# Altium PCB CC_SoC Debugger Ver1.02.PcbDoc (part 1 of 2)
Units mil, origin at the board's own origin, x right, y up, seen from the top; angles counter-clockwise.
Board outline 3750.19 x 1742.31 mil, 3 copper layers (TopLayer, MidLayer24, BottomLayer); 42 components, 43 nets, 177 pads, 79 vias.
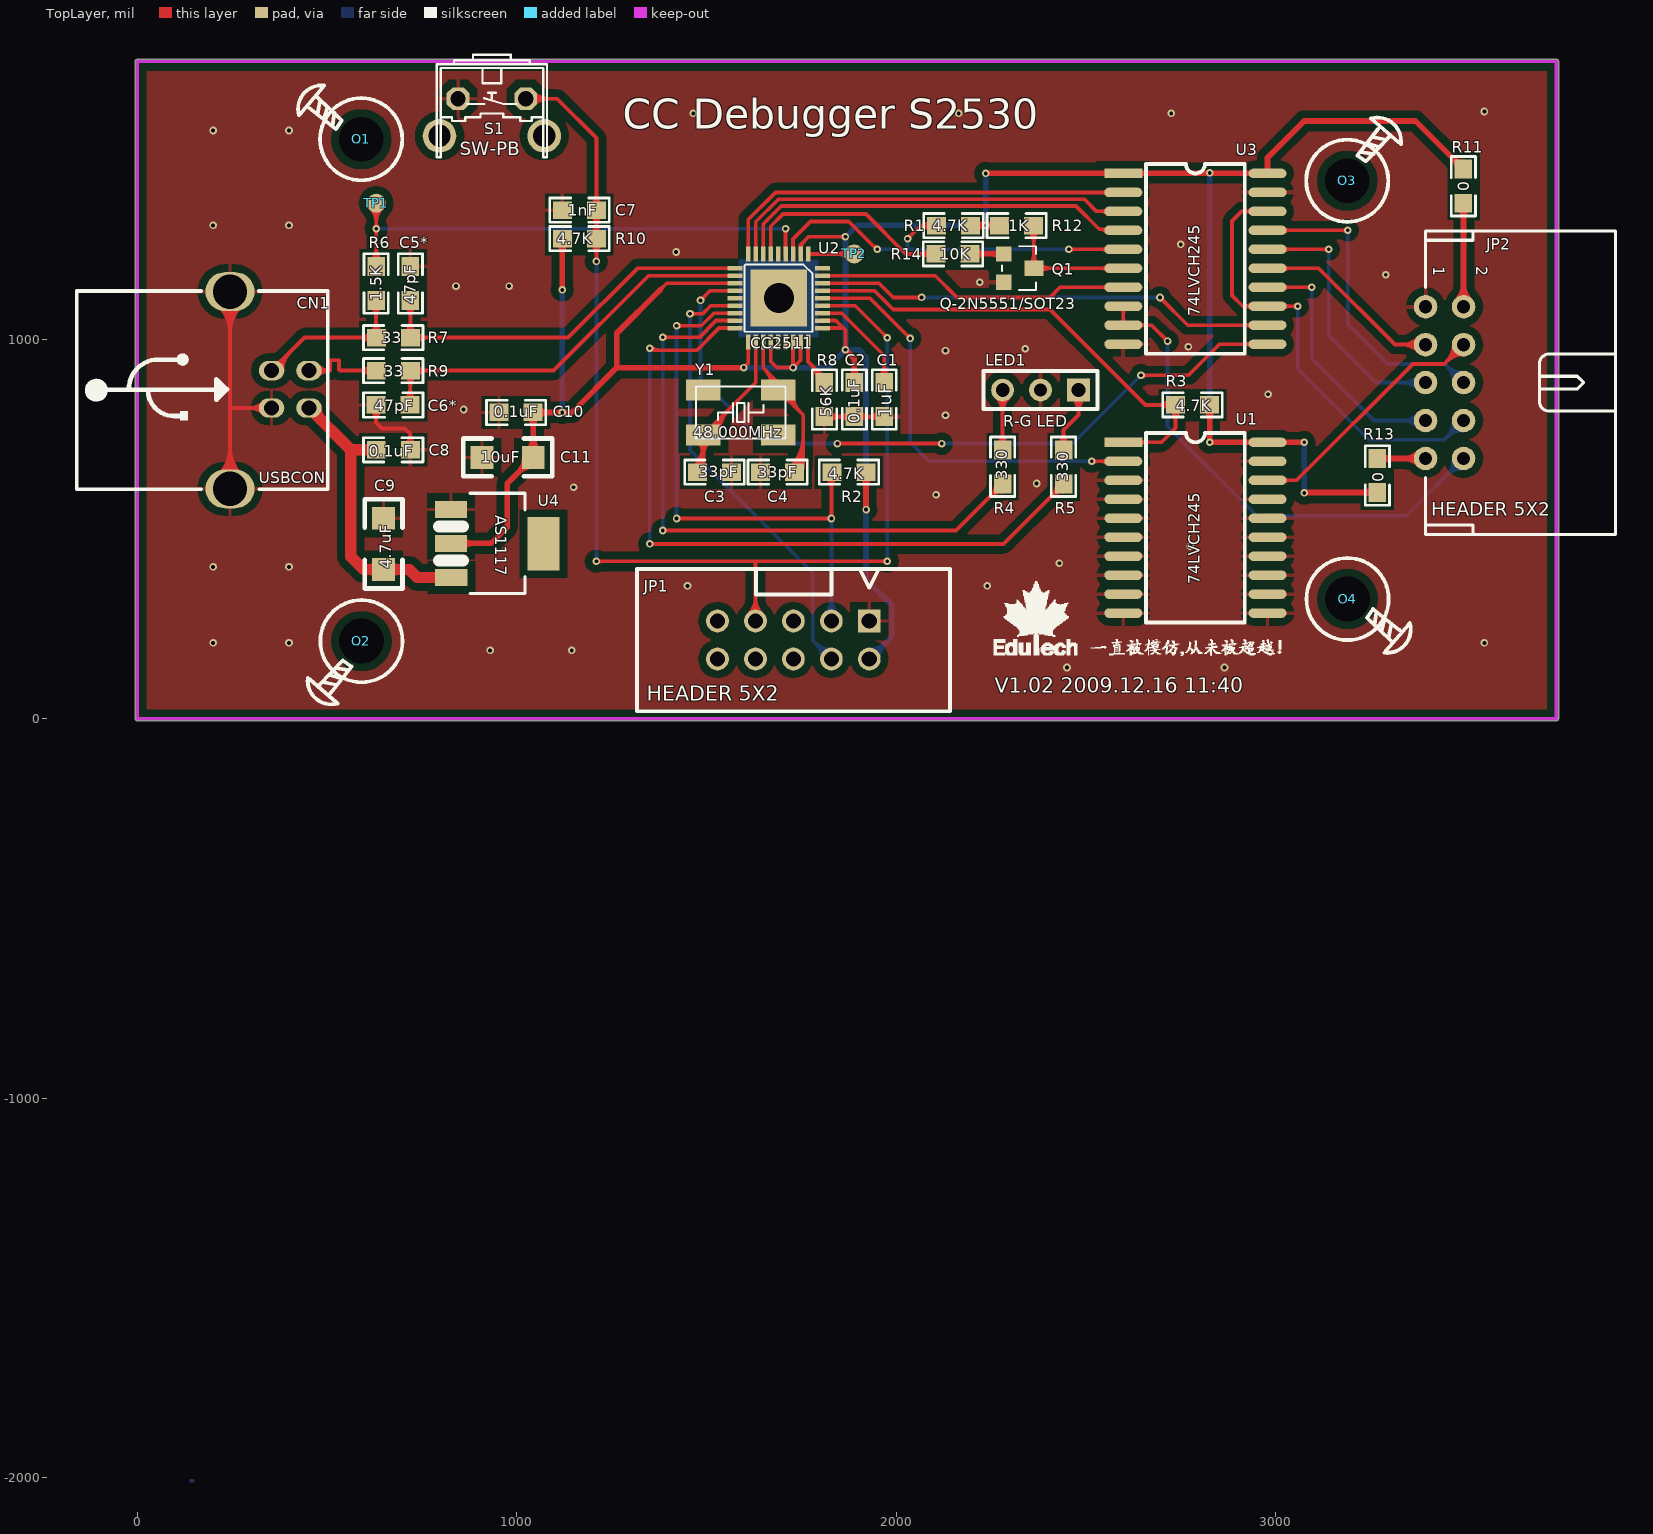
[diagram p0: TopLayer view]
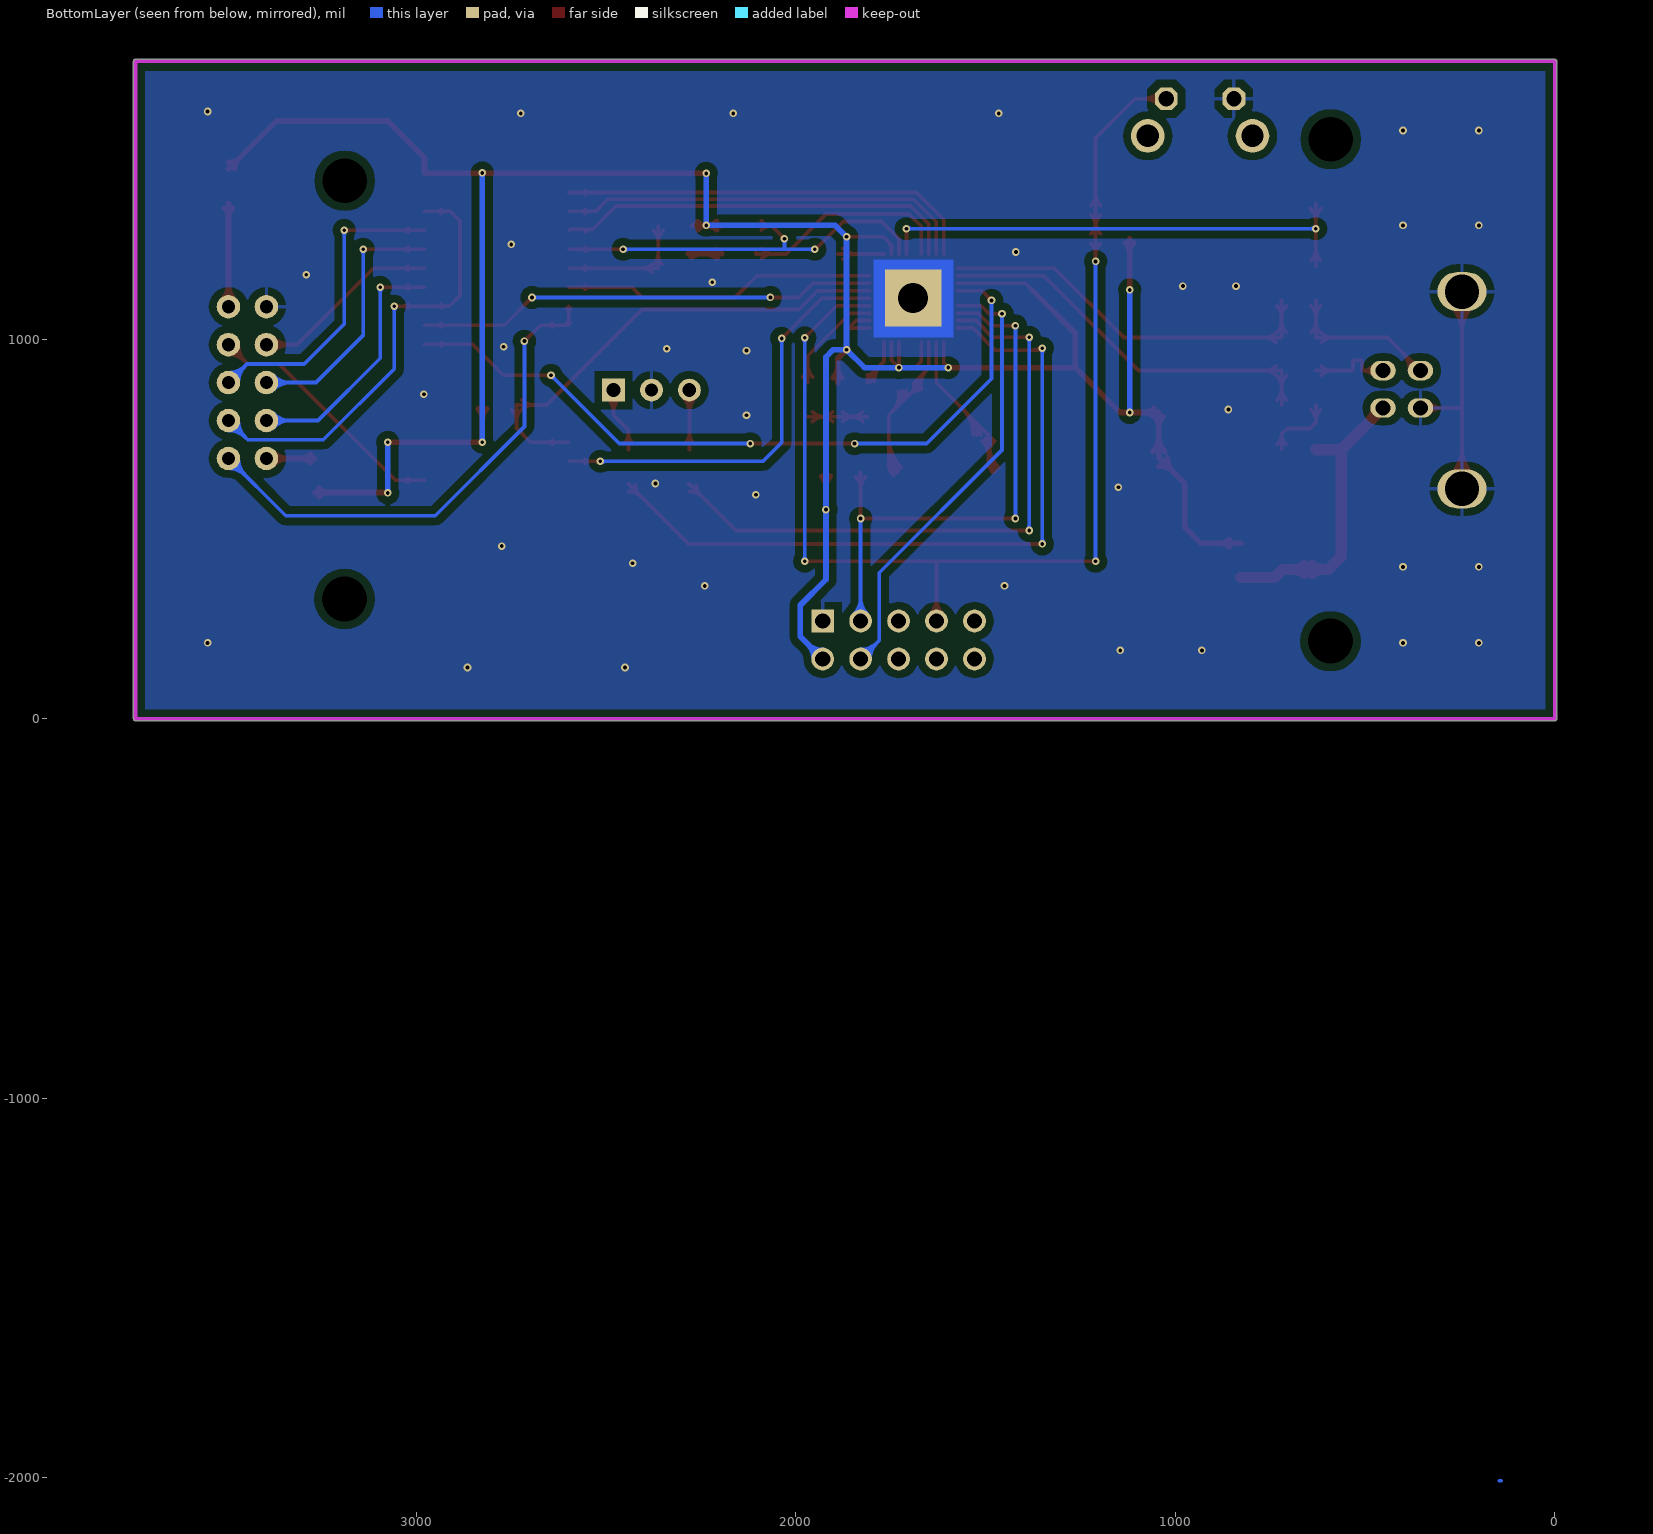
[diagram p1: BottomLayer view, seen from below]

## Layer stack, top to bottom
TopSolder: solder mask 0.4, Solder Resist, Dk 3.5
TopLayer: signal copper 1.4
Dielectric1: core 12.6, FR-4, Dk 4.8
MidLayer24: signal copper 1.4
Dielectric2: dielectric 12.6, FR-4, Dk 4.8
BottomLayer: signal copper 1.4
BottomSolder: solder mask 0.4, Solder Resist, Dk 3.5

## Board outline
0,-5.02 cw(c0,0) -5.01,0 -5.01,1732.28 cw(c0,1732.28) 0,1737.3 3740.16,1737.3 cw(c3740.16,1732.28) 3745.17,1732.28 3745.17,0 cw(c3740.16,0) 3740.16,-5.02

## Design rules (kind name [scope] priority, off if disabled: settings)
Clearance Clearance_BottomLayerGnd [InNamedPolygon('BottomLayer-GND')] p1: gap=20
Clearance Clearance_TopLayerGnd [InNamedPolygon('TopLayer-GND')] p2: gap=20
Clearance CC2511 [(InComponent('U2'))] p3: gap=6
Clearance [All] p4: gap=8
ComponentClearance [All] p1 off: gap=10 collisioncheckmode=3 verticalgap=10 showdistances=FALSE
FabricationTestPointUsage TestPointUsage [All] p1: valid=0 allowmultiple=FALSE
FabricationTestpoint Testpoint [All] p1: side=3 testpointundercomponent=TRUE minsize=40 maxsize=100 preferedsize=60 minholesize=20 maxholesize=40 preferedholesize=32 testpointgrid=1 allowsidetop=TRUE allowsidebottom=TRUE usegrid=TRUE gridtolerance=0.01
HoleSize [All] p1: absolutevalues=TRUE maxlimit=196.85 minlimit=0 maxpercent=80.000 minpercent=20.000
MatchedLengths USBD [InNetClass('All Nets') vs InNetClass('All Nets')] p1: tolerance=11.81 checknetsindiffpair=TRUE checkdiffpairvsdiffpair=TRUE checkothers=TRUE
MatchedLengths USB [InNetClass('USB') vs InNetClass('All Nets')] p2: tolerance=11.81 checknetsindiffpair=TRUE checkdiffpairvsdiffpair=TRUE checkothers=TRUE
PlaneConnect [HasPad('U2-37')] p1: planeconnectstyle=Direct reliefexpansion=20 reliefentries=4 reliefconductorwidth=10 reliefairgap=10
PolygonConnect [IsVia] p1: connectstyle=Direct reliefconductorwidth=13.78 reliefentries=4 polygonreliefangle="90 Angle" airgapwidth=10
RoutingLayers [All] p1: top layer_v5=TRUE mid layer 24_v5=FALSE bottom layer_v5=TRUE
RoutingVias [All] p1: holewidth=32 width=13.5 viastyle="Through Hole" minholewidth=32 minwidth=13.5 maxholewidth=32 maxwidth=13.5
SilkToSolderMaskClearance SilkscreenOverComponentPads [IsPad] p1: minsilkscreentomaskgap=10 clearancetoexposedcopper=TRUE
SolderMaskExpansion [All] p1: expansion=4
Width Width_VBUS [InNet('VBUS')] p1: maxlimit=47.24 minlimit=7.87 preferedwidth=39.37
Width Width_3.3V [InNet('+3.3V')] p2: maxlimit=47.24 minlimit=7.87 preferedwidth=15
Width Width_All [All] p3: maxlimit=39.37 minlimit=7.87 preferedwidth=10
22 further rules are at their usual default settings.

## Components (designator, comment, footprint, x,y, rotation, side; value= is the part's Value field where it differs from the comment)
C1 "1uF" 0805#1 1968.5,885.83 r270 top
C2 "0.1uF" 0805#1 1889.76,885.83 r270 top
C3 "33pF" 0805#1 1476.38,649.61 r0 top
C4 "33pF" 0805#1 1732.28,649.61 r180 top
C5* "47pF" 0805#1 719.85,1102.36 r90 top
C6* "47pF" 0805#1 719.37,826.77 r180 top
C7 "1nF" 0805#1 1210,1340 r180 top
C8 "0.1uF" 0805#1 629.92,708.66 r0 top
C9 "4.7uF" 1206 649.61,393.7 r90 top
C10 "0.1uF" 0805#1 1043.31,807.09 r180 top
C11 "10uF" 1206 1043.31,688.98 r180 top
CN1 "USBCON" USB-B 452.76,818.9 r270 top locked
JP1 "HEADER 5X2" HDR5X2-LP 1929.13,157.48 r90 top
JP2 "HEADER 5X2" FKV10LN 3444.88,885.83 r270 top locked
LED1 "R-G LED" LED-05/KC/C 2480.32,866.14 r180 top locked
O1 "" HOLE3_1 590.55,1527.56 r0 top locked
O2 "" HOLE3_1 590.55,204.72 r90 top locked
O3 "" HOLE3_1 3188.98,1417.32 r270 top locked
O4 "" HOLE3_1 3188.98,314.96 r180 top locked
Q1 "Q-2N5551/SOT23" sot23 2283.46,1225 r270 top
R1 "4.7K" 0805#2 2106.3,1299.21 r0 top
R2 "4.7K" 0805#1 1830.71,649.61 r0 top
R3 "4.7K" 0805#1 2736.12,827.05 r0 top
R4 "330" 0805#1 2280.32,708.66 r270 top
R5 "330" 0805#1 2440.94,708.66 r270 top
R6 "1.5K" 0805#1 629.61,1102.45 r90 top
R7 "33" 0805#1 630.01,1004.25 r0 top
R8 "56K" 0805#1 1811.02,796.38 r90 top
R9 "33" 0805#1 629.92,917.31 r0 top
R10 "4.7K" 0805#1 1210,1265 r180 top
R11 "0" 0805#3 3494.88,1358.27 r90 top
R12 "1K" 0805#1 2362.2,1299.21 r180 top
R13 "0" 0805#1 3267.72,596 r90 top
R14 "10K" 0805#1 2105,1225 r0 top
S1 "SW-PB" B3F-31XX 1023.62,1633.86 r180 top
TP1 "TP1" TESTPOINT-PAD35 629.92,1358.27 r0 top
TP2 "TP3" TESTPOINT-PAD35 1889.76,1224.81 r90 top
U1 "74LVCH245" SO20/1.27/9.652 2598.43,728.35 r270 top
U2 "CC2511" CC2511 1767.72,1224.41 r270 top
U3 "74LVCH245" SO20/1.27/9.652 2598.43,1437.01 r270 top
U4 "AS1117" SOT-223 826.77,551.18 r180 top
Y1 "48.000MHz" XTAL-6X3.5 1492,748.03 r0 top

## Footprints (in the part's own frame and the unit in brackets; to place one, negate y for a bottom-side part, rotate by r counter-clockwise, add the part's x,y. Pads: shape width x height; smd on the part's side, far side on the other; paste and mask are expansions set on the pad)
0805#1 [mm]
  rect 1.27x1.17 smd: 1(0,0) 2(2.282,0)
  silkscreen extent -0.85,-0.81 3.12,0.81
0805#2 [mm]
  rect 1.27x1.17 smd: 1(-0.003,0.007) 2(2.279,0.007)
  silkscreen extent -0.85,-0.81 3.12,0.82
0805#3 [mm]
  rect 1.27x1.17 smd: 1(0.002,0.008) 2(2.284,0.008)
  silkscreen extent -0.85,-0.8 3.13,0.82
1206 [mil]
  rect 60x60 smd: 1(-0.43,0.48) 2(134.57,0.48)
  silkscreen extent -50,-50 185,50
B3F-31XX [mil]
  oct 60x60 hole 40: 1(0,0) 2(178,0)
  round 88.5 hole 59: 3(-49,98) 4(227,98)
  silkscreen extent -56,-116 234,154
CC2511 [mm]
  rect 1x0.3 smd: 1(-0.01,0) 2(-0.01,-0.5) 3(-0.01,-1) 4(-0.01,-1.5) 5(-0.01,-2) 6(-0.01,-2.5) 7(-0.01,-3) 8(-0.01,-3.5) 9(-0.01,-4) 19(5.895,-4) 20(5.895,-3.5) 21(5.895,-3) 22(5.895,-2.5) 23(5.895,-2) 24(5.895,-1.5) 25(5.895,-1) 26(5.895,-0.5) 27(5.895,0)
  rect 0.3x1 smd: 10(0.955,-4.902) 11(1.455,-4.902) 12(1.955,-4.902) 13(2.455,-4.902) 14(2.955,-4.902) 15(3.455,-4.902) 16(3.955,-4.902) 17(4.455,-4.902) 18(4.955,-4.902) 28(4.955,0.965) 29(4.455,0.965) 30(3.955,0.965) 31(3.455,0.965) 32(2.955,0.965) 33(2.455,0.965) 34(1.955,0.965) 35(1.455,0.965) 36(0.955,0.965)
  rect 3.8x3.8 hole 2: 37(2.936,-1.956)
  silkscreen extent 0.7,-4.24 5.2,0.3
FKV10LN [mil]
  round 62 hole 35: 1(-200,-50) 2(-200,50) 3(-100,-50) 4(-100,50) 5(0,-50) 6(0,50) 7(100,-50) 8(100,50) 9(200,-50) 10(200,50)
  silkscreen extent -400,-50 400,450
HDR5X2-LP [mil]
  rect 60x60 / inner round 60 / far side rect 60x60 hole 40: 1(100,0)
  round 60 hole 40: 2(0,0) 3(100,100) 4(0,100) 5(100,200) 6(0,200) 7(100,300) 8(0,300) 9(100,400) 10(0,400)
  silkscreen extent -138,-212 238,612
HOLE3_1 [mm]
  round 1 hole 3 unplated: 0(-0.007,-0.011)
  silkscreen extent -4.23,-2.76 2.74,3.59
LED-05/KC/C [mil]
  rect 60x60 hole 36: 1(0,0)
  round 60 hole 35: 2(100,0)
  round 60 hole 36: 3(200,0)
  silkscreen extent -50,-50 250,50
SO20/1.27/9.652 [mil]
  rect 25x100 smd: 1(0,0)
  oval 25x100 smd: 2(50,0) 3(100,0) 4(150,0) 5(200,0) 6(250,0) 7(300,0) 8(350,0) 9(400,0) 10(450,0) 11(450,380) 12(400,380) 13(350,380) 14(300,380) 15(250,380) 16(200,380) 17(150,380) 18(100,380) 19(50,380) 20(0,380)
  silkscreen extent -25,60 475,320
sot23 [mil]
  rect 40x40 smd: 1(0,0) 2(75,0)
  rect 40x50 smd: 3(38,80)
  silkscreen extent -20,-5 95,85
SOT-223 [mil]
  rect 85x45 smd: 1(0,0) 2(0,89) 3(-1,179)
  rect 85x140 smd: 4(-244,90)
  silkscreen extent -195,-43 31,221
TESTPOINT-PAD35 [mil]
  round 50 smd: 1(-0.1,0.3)
USB-B [mm]
  oval 1.3x1.7 hole 1.016: D+(-2.5,-2.506) D-(-2.5,-0.006) VBUS(0,-0.006) VSS(0,-2.506)
  oval 2.6x3.3 hole 2.3: SH1(-7.789,-5.287) SH2(5.411,-5.287)
  silkscreen extent -7.82,-15.55 5.44,1.25
XTAL-6X3.5 [mm]
  rect 2.3x1.4 smd: 1(0,0) 2(5,0) 3(5,3) 4(0,3)
  silkscreen extent -0.5,-0.25 5.5,3.25

## Part data
C2 C3 C4 C5* C6* C7 C8 C10: library part CAP, "Capacitor"
C9 C11: library part C2
LED1: library part LED-05/KC/COMMON_K, "312"
Q1: "311000001"
R1 R2 R3 R4 R5 R6 R7 R8 R9 R10 R12 R13 R14: library part RES1
TP1 TP2: library part TP
U1 U3: "313"

## Via types
v1: diameter 20, hole 10, TopLayer to BottomLayer, 79 vias

## Nets (pads, with @x,y where several pads share a name; then routed paths per layer and width w, separated by ;. In a path a pad name is that pad's centre, name@x,y a point inside that pad or via, vN(x,y) a via of type N, cw(c..) or ccw(c..) an arc to the next point about the centre after c; other vN are vias at no path point)
+3.3V: C2.1 C10.1 C11.1 JP1.2 R1.2 R2.2 R3.2 R10.2 R11.2 R12.2 R13.1 U1.20 U2.2 U2.12 U2.19 U2.22 U2.25 U2.26 U2.28 U2.29 U3.1 U3.20 U4.2 | length 10860.3
  TopLayer w10: 1377.95,1129.92 1395.47,1147.44 U2.12@1574.72,1147.44 ; v1(1598.43,925.2) 1610.24,937.01 U2.19@1610.24,992.33 ; U2.22@1669.29,992.33 1669.29,940.94 1685.04,925.2 v1@1724.41,925.2 ; U2.25@1728.35,992.33 v1(1728.35,925.2) 1748.03,944.88 U2.26@1748.03,992.33 ; U2.2@1748.03,1224.81 1748.03,1248.92 1769.11,1270 v1(1866.14,1270) ; U2.28@1805.72,1029.33 1860.43,1029.33 ; U2.29@1805.72,1049.02 1840.75,1049.02 1860.43,1029.33 ; v1(1866.14,972.44) 1866.14,1023.62 1860.43,1029.33 ; 1716.28,925.2 cw(c1716.28,913.13) v1@1724.81,921.66 ; 1716.28,925.2 ccw(c1716.28,937.27) v1@1724.81,928.73 ; 1716.28,925.2 cw(c1716.28,913.13) v1@1724.81,921.66 ; 1716.28,925.2 ccw(c1716.28,937.27) v1@1724.81,928.73 ; 1716.28,925.2 cw(c1716.28,913.13) v1@1724.81,921.66 ; 1716.28,925.2 ccw(c1716.28,937.27) v1@1724.81,928.73 ; v1@1724.81,928.73 ccw(c1716.28,937.27) 1728.35,937.27 ; v1@1724.81,928.73 ccw(c1716.28,937.27) 1728.35,937.27 ; v1@1724.81,928.73 ccw(c1716.28,937.27) 1728.35,937.27 ; v1@1728.35,930.2 ccw(c1728.35,942.27) 1736.88,933.73 ; v1@1728.35,930.2 ccw(c1728.35,942.27) 1736.88,933.73 ; v1@1728.35,930.2 ccw(c1728.35,942.27) 1736.88,933.73 ; 1728.35,937.27 ccw(c1740.42,937.27) v1@1731.88,928.73 ; 1728.35,937.27 ccw(c1740.42,937.27) v1@1731.88,928.73 ; 1728.35,937.27 ccw(c1740.42,937.27) v1@1731.88,928.73 ; v1@1733.35,925.2 cw(c1745.42,925.2) 1736.88,933.73 ; v1@1733.35,925.2 cw(c1745.42,925.2) 1736.88,933.73 ; v1@1733.35,925.2 cw(c1745.42,925.2) 1736.88,933.73 ; U2.2@1748.94,1238.59 cw(c1776.07,1238.59) 1756.88,1257.78 ; U2.2@1748.94,1238.59 cw(c1776.07,1238.59) 1756.88,1257.78 ; U2.2@1748.94,1238.59 cw(c1776.07,1238.59) 1756.88,1257.78 ; U2.2@1748.94,1238.59 cw(c1776.07,1238.59) 1756.88,1257.78 ; 1854.07,1270 cw(c1854.07,1257.93) v1@1862.61,1266.46 ; 1854.07,1270 ccw(c1854.07,1282.07) v1@1862.61,1273.54 ; 1854.07,1270 cw(c1854.07,1257.93) v1@1862.61,1266.46 ; 1854.07,1270 ccw(c1854.07,1282.07) v1@1862.61,1273.54 ; 1854.07,1270 cw(c1854.07,1257.93) v1@1862.61,1266.46 ; 1854.07,1270 ccw(c1854.07,1282.07) v1@1862.61,1273.54 ; v1@1862.61,975.98 ccw(c1854.07,984.51) 1866.14,984.51 ; v1@1862.61,975.98 ccw(c1854.07,984.51) 1866.14,984.51 ; v1@1862.61,975.98 ccw(c1854.07,984.51) 1866.14,984.51 ; 1866.14,984.51 ccw(c1878.21,984.51) v1@1869.68,975.98 ; 1866.14,984.51 ccw(c1878.21,984.51) v1@1869.68,975.98 ; 1866.14,984.51 ccw(c1878.21,984.51) v1@1869.68,975.98
  TopLayer w15: U4.2@826.77,462.18 932.18,462.18 975,505 975,619.76 C11.1@1043.73,688.5 1043.73,806.66 C10.1@1043.31,807.09 v1(1120.16,807.09) 1145.67,807.09 1263.78,925.2 ; v1(1120.16,1130) R10.2@1120.16,1265 ; 1377.95,1129.92 1263.78,1015.75 1263.78,925.2 ; v1(1598.43,925.2) 1263.78,925.2 ; v1(1866.14,972.44) 1889.76,948.82 C2.1@1889.76,885.83 ; v1(1920.55,551.18) R2.2@1920.55,649.61 ; R1.2@2196.14,1299.21 2196.23,1299.3 2196.93,1300 v1(2236.14,1300) ; v1(2236.14,1437.01) U3.1@2598.43,1437.01 2825.96,1437.01 U3.20@2978.43,1437.01 2978.43,1478.43 3075,1575 3367.99,1575 3494.68,1448.31 R11.2@3494.88,1448.11 ; R12.2@2272.36,1299.21 2271.57,1300 v1(2236.14,1300) ; R3.2@2825.96,827.05 v1(2825.96,728.35) U1.20@2978.43,728.35 v1(3075,728.35) ; v1@3075,596 R13.1@3267.72,596 ; U4.2@857.38,451.57 cw(c882.98,425.97) 882.98,462.18 ; U4.2@857.38,451.57 cw(c882.98,425.97) 882.98,462.18 ; U4.2@857.38,451.57 cw(c882.98,425.97) 882.98,462.18 ; U4.2@857.38,472.79 ccw(c882.98,498.39) 882.98,462.18 ; U4.2@857.38,472.79 ccw(c882.98,498.39) 882.98,462.18 ; U4.2@857.38,472.79 ccw(c882.98,498.39) 882.98,462.18 ; 1005.32,650.09 cw(c1043.73,611.68) C11.1@1043.73,666 ; 1005.32,650.09 ccw(c966.91,688.5) C11.1@1021.23,688.5 ; 1005.32,650.09 cw(c1043.73,611.68) C11.1@1043.73,666 ; 1005.32,650.09 ccw(c966.91,688.5) C11.1@1021.23,688.5 ; 1005.32,650.09 cw(c1043.73,611.68) C11.1@1043.73,666 ; 1005.32,650.09 ccw(c966.91,688.5) C11.1@1021.23,688.5 ; C11.1@1027.82,704.41 ccw(c989.41,742.82) 1043.73,742.82 ; C11.1@1027.82,704.41 ccw(c989.41,742.82) 1043.73,742.82 ; C11.1@1027.82,704.41 ccw(c989.41,742.82) 1043.73,742.82 ; C10.1@1032.32,796.1 cw(c1004.78,768.56) 1043.73,768.56 ; C10.1@1032.32,796.1 cw(c1004.78,768.56) 1043.73,768.56 ; C10.1@1032.32,796.1 cw(c1004.78,768.56) 1043.73,768.56 ; 1043.73,742.82 ccw(c1098.05,742.82) C11.1@1059.64,704.41 ; 1043.73,742.82 ccw(c1098.05,742.82) C11.1@1059.64,704.41 ; 1043.73,742.82 ccw(c1098.05,742.82) C11.1@1059.64,704.41 ; 1043.73,770.62 cw(c1079.78,770.62) C10.1@1054.29,796.1 ; 1043.73,770.62 cw(c1079.78,770.62) C10.1@1054.29,796.1 ; 1043.73,770.62 cw(c1079.78,770.62) C10.1@1054.29,796.1 ; C10.1@1056.26,796.1 cw(c1082.77,769.59) 1082.77,807.09 ; C10.1@1056.26,796.1 cw(c1082.77,769.59) 1082.77,807.09 ; C10.1@1056.26,796.1 cw(c1082.77,769.59) 1082.77,807.09 ; C10.1@1056.26,818.07 ccw(c1082.77,844.58) 1082.77,807.09 ; C10.1@1056.26,818.07 ccw(c1082.77,844.58) 1082.77,807.09 ; C10.1@1056.26,818.07 ccw(c1082.77,844.58) 1082.77,807.09 ; R10.2@1109.17,1254.02 cw(c1082.66,1227.5) 1120.16,1227.5 ; R10.2@1109.17,1254.02 cw(c1082.66,1227.5) 1120.16,1227.5 ; R10.2@1109.17,1254.02 cw(c1082.66,1227.5) 1120.16,1227.5 ; 1120.16,1227.5 cw(c1157.65,1227.5) R10.2@1131.14,1254.02 ; 1120.16,1227.5 cw(c1157.65,1227.5) R10.2@1131.14,1254.02 ; 1120.16,1227.5 cw(c1157.65,1227.5) R10.2@1131.14,1254.02 ; C2.1@1878.78,898.78 ccw(c1852.27,925.29) 1889.76,925.29 ; C2.1@1878.78,898.78 ccw(c1852.27,925.29) 1889.76,925.29 ; C2.1@1878.78,898.78 ccw(c1852.27,925.29) 1889.76,925.29 ; 1889.76,925.29 ccw(c1927.26,925.29) C2.1@1900.75,898.78 ; 1889.76,925.29 ccw(c1927.26,925.29) C2.1@1900.75,898.78 ; 1889.76,925.29 ccw(c1927.26,925.29) C2.1@1900.75,898.78 ; R2.2@1909.57,638.62 cw(c1883.06,612.11) 1920.55,612.11 ; R2.2@1909.57,638.62 cw(c1883.06,612.11) 1920.55,612.11 ; R2.2@1909.57,638.62 cw(c1883.06,612.11) 1920.55,612.11 ; 1920.55,612.11 cw(c1958.05,612.11) R2.2@1931.53,638.62 ; 1920.55,612.11 cw(c1958.05,612.11) R2.2@1931.53,638.62 ; 1920.55,612.11 cw(c1958.05,612.11) R2.2@1931.53,638.62 ; R1.2@2208.99,1310.47 ccw(c2234.27,1335.75) v1@2234.27,1300 ; R1.2@2208.99,1310.47 ccw(c2234.27,1335.75) v1@2234.27,1300 ; R1.2@2208.99,1310.47 ccw(c2234.27,1335.75) v1@2234.27,1300 ; R1.2@2209.11,1288.63 cw(c2236.14,1262.2) v1(2236.14,1300) ; R1.2@2209.11,1288.63 cw(c2236.14,1262.2) v1(2236.14,1300) ; R1.2@2209.11,1288.63 cw(c2236.14,1262.2) v1(2236.14,1300) ; v1(2236.14,1300) cw(c2236.14,1271.43) R12.2@2258.33,1289.43 ; v1(2236.14,1300) ccw(c2236.14,1331.62) R12.2@2259.11,1309.89 ; v1(2236.14,1300) cw(c2236.14,1271.43) R12.2@2258.33,1289.43 ; v1(2236.14,1300) ccw(c2236.14,1331.62) R12.2@2259.11,1309.89 ; v1(2236.14,1300) cw(c2236.14,1271.43) R12.2@2258.33,1289.43 ; v1(2236.14,1300) ccw(c2236.14,1331.62) R12.2@2259.11,1309.89 ; R3.2@2814.98,816.06 cw(c2788.47,789.55) 2825.96,789.55 ; R3.2@2814.98,816.06 cw(c2788.47,789.55) 2825.96,789.55 ; R3.2@2814.98,816.06 cw(c2788.47,789.55) 2825.96,789.55 ; 2825.96,789.55 cw(c2863.46,789.55) R3.2@2836.94,816.06 ; 2825.96,789.55 cw(c2863.46,789.55) R3.2@2836.94,816.06 ; 2825.96,789.55 cw(c2863.46,789.55) R3.2@2836.94,816.06 ; 3230.22,596 cw(c3230.22,558.5) R13.1@3256.73,585.02 ; 3230.22,596 ccw(c3230.22,633.5) R13.1@3256.73,606.98 ; 3230.22,596 cw(c3230.22,558.5) R13.1@3256.73,585.02 ; 3230.22,596 ccw(c3230.22,633.5) R13.1@3256.73,606.98 ; 3230.22,596 cw(c3230.22,558.5) R13.1@3256.73,585.02 ; 3230.22,596 ccw(c3230.22,633.5) R13.1@3256.73,606.98 ; 3465.08,1477.91 ccw(c3494.57,1507.39) R11.2@3494.57,1465.7 ; 3465.08,1477.91 ccw(c3494.57,1507.39) R11.2@3494.57,1465.7 ; 3465.08,1477.91 ccw(c3494.57,1507.39) R11.2@3494.57,1465.7 ; 3469.28,1473.71 cw(c3445.74,1450.17) R11.2@3479.04,1450.17 ; 3469.28,1473.71 cw(c3445.74,1450.17) R11.2@3479.04,1450.17 ; 3469.28,1473.71 cw(c3445.74,1450.17) R11.2@3479.04,1450.17
  BottomLayer w15: v1(1120.16,807.09) v1@1120.16,1129.33 ; v1(1598.43,925.2) v1(1728.35,925.2) 1818.9,925.2 v1(1866.14,972.44) ; JP1.2@1929.13,157.48 1988.19,216.54 1988.19,299.21 1920.55,366.85 v1(1920.55,551.18) 1920.55,953.46 1901.57,972.44 v1(1866.14,972.44) ; v1@2230,1300 1896.14,1300 v1(1866.14,1270) v1(1866.14,972.44) ; v1(2236.14,1300) v1(2236.14,1437.01) ; v1(2825.96,728.35) v1(2825.96,1438.19) ; v1@3075,596 v1(3075,728.35) ; JP1.2@1929.13,179.98 ccw(c1929.13,234.3) 1967.54,195.89 ; JP1.2@1929.13,179.98 ccw(c1929.13,234.3) 1967.54,195.89 ; JP1.2@1929.13,179.98 ccw(c1929.13,234.3) 1967.54,195.89 ; JP1.2@1929.13,179.98 ccw(c1929.13,234.3) 1967.54,195.89 ; JP1.2@1951.63,157.48 cw(c2005.95,157.48) 1967.54,195.89 ; JP1.2@1951.63,157.48 cw(c2005.95,157.48) 1967.54,195.89 ; JP1.2@1951.63,157.48 cw(c2005.95,157.48) 1967.54,195.89 ; JP1.2@1951.63,157.48 cw(c2005.95,157.48) 1967.54,195.89
  other v1: 3075,595
D+: C5*.1 R7.2 U2.10 | length 1644.5
  TopLayer w10: C5*.1@719.85,1102.36 R7.2@719.85,1004.25 ; R7.2@720.17,1003.94 R7.2@719.85,1004.25 ; U2.10@1574.72,1186.81 1318.08,1186.81 1135.52,1004.25 R7.2@719.85,1004.25 ; R7.2@707.1,1017 ccw(c676.32,1047.78) 719.85,1047.78 ; R7.2@707.1,1017 ccw(c676.32,1047.78) 719.85,1047.78 ; R7.2@707.1,1017 ccw(c676.32,1047.78) 719.85,1047.78 ; C5*.1@707.1,1087.64 cw(c676.32,1056.86) 719.85,1056.86 ; C5*.1@707.1,1087.64 cw(c676.32,1056.86) 719.85,1056.86 ; C5*.1@707.1,1087.64 cw(c676.32,1056.86) 719.85,1056.86 ; 719.85,1047.79 ccw(c763.38,1047.79) R7.2@732.6,1017 ; 719.85,1047.79 ccw(c763.38,1047.79) R7.2@732.6,1017 ; 719.85,1047.79 ccw(c763.38,1047.79) R7.2@732.6,1017 ; 719.85,1056.86 cw(c763.38,1056.86) C5*.1@732.6,1087.64 ; 719.85,1056.86 cw(c763.38,1056.86) C5*.1@732.6,1087.64 ; 719.85,1056.86 cw(c763.38,1056.86) C5*.1@732.6,1087.64 ; R7.2@734.57,991.5 cw(c765.35,960.72) 765.35,1004.25 ; R7.2@734.57,991.5 cw(c765.35,960.72) 765.35,1004.25 ; R7.2@734.57,991.5 cw(c765.35,960.72) 765.35,1004.25 ; R7.2@734.57,1017 ccw(c765.35,1047.78) 765.35,1004.25 ; R7.2@734.57,1017 ccw(c765.35,1047.78) 765.35,1004.25 ; R7.2@734.57,1017 ccw(c765.35,1047.78) 765.35,1004.25
D-: C6*.1 R9.2 U2.11 | length 1664.6
  TopLayer w10: C6*.1@719.37,826.77 719.76,827.17 R9.2@719.76,917.31 1097.31,917.31 1347.13,1167.13 U2.11@1574.72,1167.13 ; C6*.1@706.62,839.52 ccw(c674.89,871.25) 719.76,871.25 ; C6*.1@706.62,839.52 ccw(c674.89,871.25) 719.76,871.25 ; C6*.1@706.62,839.52 ccw(c674.89,871.25) 719.76,871.25 ; R9.2@707.01,904.56 cw(c676.23,873.78) 719.76,873.78 ; R9.2@707.01,904.56 cw(c676.23,873.78) 719.76,873.78 ; R9.2@707.01,904.56 cw(c676.23,873.78) 719.76,873.78 ; 719.76,869.35 ccw(c761.95,869.35) C6*.1@732.12,839.52 ; 719.76,869.35 ccw(c761.95,869.35) C6*.1@732.12,839.52 ; 719.76,869.35 ccw(c761.95,869.35) C6*.1@732.12,839.52 ; 719.76,873.78 cw(c763.3,873.78) R9.2@732.51,904.56 ; 719.76,873.78 cw(c763.3,873.78) R9.2@732.51,904.56 ; 719.76,873.78 cw(c763.3,873.78) R9.2@732.51,904.56 ; R9.2@734.48,904.56 cw(c765.26,873.78) 765.26,917.31 ; R9.2@734.48,904.56 cw(c765.26,873.78) 765.26,917.31 ; R9.2@734.48,904.56 cw(c765.26,873.78) 765.26,917.31 ; R9.2@734.48,930.06 ccw(c765.26,960.85) 765.26,917.31 ; R9.2@734.48,930.06 ccw(c765.26,960.85) 765.26,917.31 ; R9.2@734.48,930.06 ccw(c765.26,960.85) 765.26,917.31
D\B\G\_R\E\S\E\T\: Q1.3 R12.1 U3.6 | length 979.5
  TopLayer w10: R12.1@2362.2,1299.21 2362.2,1188.26 Q1.3@2363.46,1187 ; Q1.3@2363.46,1187 U3.6@2598.43,1187.01 ; R12.1@2349.45,1286.46 cw(c2318.67,1255.68) 2362.2,1255.68 ; R12.1@2349.45,1286.46 cw(c2318.67,1255.68) 2362.2,1255.68 ; R12.1@2349.45,1286.46 cw(c2318.67,1255.68) 2362.2,1255.68 ; Q1.3@2352.86,1197.61 ccw(c2330.29,1220.17) 2362.2,1220.17 ; Q1.3@2352.86,1197.61 ccw(c2330.29,1220.17) 2362.2,1220.17 ; Q1.3@2352.86,1197.61 ccw(c2330.29,1220.17) 2362.2,1220.17 ; 2362.2,1226.25 ccw(c2402.72,1226.25) Q1.3@2374.07,1197.61 ; 2362.2,1226.25 ccw(c2402.72,1226.25) Q1.3@2374.07,1197.61 ; 2362.2,1226.25 ccw(c2402.72,1226.25) Q1.3@2374.07,1197.61 ; 2362.2,1255.68 cw(c2405.74,1255.68) R12.1@2374.95,1286.46 ; 2362.2,1255.68 cw(c2405.74,1255.68) R12.1@2374.95,1286.46 ; 2362.2,1255.68 cw(c2405.74,1255.68) R12.1@2374.95,1286.46 ; Q1.3@2379.07,1176.39 cw(c2404.7,1150.77) 2404.7,1187.01 ; Q1.3@2379.07,1176.39 cw(c2404.7,1150.77) 2404.7,1187.01 ; Q1.3@2379.07,1176.39 cw(c2404.7,1150.77) 2404.7,1187.01 ; Q1.3@2379.07,1197.61 ccw(c2404.66,1223.19) 2404.66,1187.01 ; Q1.3@2379.07,1197.61 ccw(c2404.66,1223.19) 2404.66,1187.01 ; Q1.3@2379.07,1197.61 ccw(c2404.66,1223.19) 2404.66,1187.01 ; 2542.82,1187.01 cw(c2542.82,1168.9) U3.6@2555.62,1181.7 ; 2542.82,1187.01 ccw(c2542.82,1205.11) U3.6@2555.62,1192.31 ; 2542.82,1187.01 cw(c2542.82,1168.9) U3.6@2555.62,1181.7 ; 2542.82,1187.01 ccw(c2542.82,1205.11) U3.6@2555.62,1192.31 ; 2542.82,1187.01 cw(c2542.82,1168.9) U3.6@2555.62,1181.7 ; 2542.82,1187.01 ccw(c2542.82,1205.11) U3.6@2555.62,1192.31
DBG_DC: R1.1 U2.3 U3.5 | length 1667.1
  TopLayer w10: U2.3@1728.35,1224.81 1728.35,1263.78 1774.57,1310 1875,1310 1949,1236 v1@1950,1235 ; v1(2030,1265) 2064.21,1299.21 ; R1.1@2106.3,1299.21 2106.2,1299.21 2064.21,1299.21 ; v1(2455,1237.01) U3.5@2598.43,1237.01 ; 1938.04,1246.96 ccw(c1950,1258.93) v1@1950,1242.01 ; 1938.04,1246.96 ccw(c1950,1258.93) v1@1950,1242.01 ; 1938.04,1246.96 ccw(c1950,1258.93) v1@1950,1242.01 ; v1@2030,1270 ccw(c2030,1282.07) 2038.54,1273.54 ; v1@2030,1270 ccw(c2030,1282.07) 2038.54,1273.54 ; v1@2030,1270 ccw(c2030,1282.07) 2038.54,1273.54 ; v1@2035,1265 cw(c2047.07,1265) 2038.54,1273.54 ; v1@2035,1265 cw(c2047.07,1265) 2038.54,1273.54 ; v1@2035,1265 cw(c2047.07,1265) 2038.54,1273.54 ; 2064.21,1299.21 cw(c2064.21,1263.28) R1.1@2090.86,1287.39 ; 2064.21,1299.21 ccw(c2064.21,1334.07) R1.1@2090.59,1311.28 ; 2064.21,1299.21 cw(c2064.21,1263.28) R1.1@2090.86,1287.39 ; 2064.21,1299.21 ccw(c2064.21,1334.07) R1.1@2090.59,1311.28 ; 2064.21,1299.21 cw(c2064.21,1263.28) R1.1@2090.86,1287.39 ; 2064.21,1299.21 ccw(c2064.21,1334.07) R1.1@2090.59,1311.28 ; v1@2458.54,1233.47 cw(c2467.07,1224.94) 2467.07,1237.01 ; v1@2458.54,1233.47 cw(c2467.07,1224.94) 2467.07,1237.01 ; v1@2458.54,1233.47 cw(c2467.07,1224.94) 2467.07,1237.01 ; v1@2458.54,1240.54 ccw(c2467.07,1249.08) 2467.07,1237.01 ; v1@2458.54,1240.54 ccw(c2467.07,1249.08) 2467.07,1237.01 ; v1@2458.54,1240.54 ccw(c2467.07,1249.08) 2467.07,1237.01 ; 2542.82,1237.01 cw(c2542.82,1218.9) U3.5@2555.62,1231.7 ; 2542.82,1237.01 ccw(c2542.82,1255.11) U3.5@2555.62,1242.31 ; 2542.82,1237.01 cw(c2542.82,1218.9) U3.5@2555.62,1231.7 ; 2542.82,1237.01 ccw(c2542.82,1255.11) U3.5@2555.62,1242.31 ; 2542.82,1237.01 cw(c2542.82,1218.9) U3.5@2555.62,1231.7 ; 2542.82,1237.01 ccw(c2542.82,1255.11) U3.5@2555.62,1242.31
  BottomLayer w10: v1(1950,1237.01) 2030,1237.01 ; v1(2030,1265) 2030,1237.01 ; v1(2455,1237.01) 2030,1237.01 ; v1@1953.54,1233.47 cw(c1962.07,1224.94) 1962.07,1237.01 ; v1@1953.54,1233.47 cw(c1962.07,1224.94) 1962.07,1237.01 ; v1@1953.54,1233.47 cw(c1962.07,1224.94) 1962.07,1237.01 ; v1@1953.54,1240.54 ccw(c1962.07,1249.08) 1962.07,1237.01 ; v1@1953.54,1240.54 ccw(c1962.07,1249.08) 1962.07,1237.01 ; v1@1953.54,1240.54 ccw(c1962.07,1249.08) 1962.07,1237.01 ; v1@2026.46,1261.46 cw(c2017.93,1252.93) 2030,1252.93 ; v1@2026.46,1261.46 cw(c2017.93,1252.93) 2030,1252.93 ; v1@2026.46,1261.46 cw(c2017.93,1252.93) 2030,1252.93 ; 2030,1252.93 cw(c2042.07,1252.93) v1@2033.54,1261.46 ; 2030,1252.93 cw(c2042.07,1252.93) v1@2033.54,1261.46 ; 2030,1252.93 cw(c2042.07,1252.93) v1@2033.54,1261.46 ; 2442.93,1237.01 cw(c2442.93,1224.94) v1@2451.46,1233.47 ; 2442.93,1237.01 ccw(c2442.93,1249.08) v1@2451.46,1240.54 ; 2442.93,1237.01 cw(c2442.93,1224.94) v1@2451.46,1233.47 ; 2442.93,1237.01 ccw(c2442.93,1249.08) v1@2451.46,1240.54 ; 2442.93,1237.01 cw(c2442.93,1224.94) v1@2451.46,1233.47 ; 2442.93,1237.01 ccw(c2442.93,1249.08) v1@2451.46,1240.54
DBG_DC_DIR: TP2.1 U2.1 | length 197.6
  TopLayer w10: U2.1@1767.72,1224.81 TP2.1@1889.46,1224.81 ; 1840.94,1224.81 cw(c1840.94,1176.19) TP2.1@1875.32,1210.57 ; 1841.42,1224.81 ccw(c1841.42,1272.75) TP2.1@1875.32,1238.85
DBG_DD: U1.2 U2.32 | length 1292.6
  TopLayer w10: U2.32@1805.72,1108.07 1931.3,1108.07 v1(2037.19,1002.19) ; v1@2032.19,1002.19 ccw(c2020.11,1002.19) 2028.65,1010.72 ccw(c2037.19,1019.26) v1@2037.19,1007.18 ; v1(2515,678.35) U1.2@2598.43,678.35 ; v1@2518.54,674.81 cw(c2527.07,666.28) 2527.07,678.35 cw(c2527.07,690.42) v1@2518.54,681.88 ; 2542.82,678.35 cw(c2542.82,660.24) U1.2@2555.62,673.04 ; 2542.82,678.35 ccw(c2542.82,696.45) U1.2@2555.62,683.65 ; 2542.82,678.35 cw(c2542.82,660.24) U1.2@2555.62,673.04 ; 2542.82,678.35 ccw(c2542.82,696.45) U1.2@2555.62,683.65 ; 2542.82,678.35 cw(c2542.82,660.24) U1.2@2555.62,673.04 ; 2542.82,678.35 ccw(c2542.82,696.45) U1.2@2555.62,683.65
  BottomLayer w10: v1@2033.65,998.65 cw(c2025.11,990.11) 2037.19,990.11 cw(c2049.26,990.11) v1@2040.72,998.65 ; v1(2037.19,1002.19) 2037.19,727.81 2086.65,678.35 v1(2515,678.35) ; v1@2511.46,674.81 ccw(c2502.93,666.28) 2502.93,678.35 ccw(c2502.93,690.42) v1@2511.46,681.88
DBG_DD_DIR: R3.1 U1.1 U2.33 | length 1764.8
  TopLayer w10: U2.33@1805.72,1127.76 1943.11,1127.76 1992.13,1078.74 2405,1078.74 2656.69,827.05 R3.1@2736.12,827.05 2736.12,766.12 2698.35,728.35 U1.1@2598.43,728.35 ; U1.1@2641.23,723.04 cw(c2654.03,710.24) 2654.03,728.35 ; U1.1@2641.23,723.04 cw(c2654.03,710.24) 2654.03,728.35 ; U1.1@2641.23,723.04 cw(c2654.03,710.24) 2654.03,728.35 ; U1.1@2641.23,733.65 ccw(c2654.03,746.45) 2654.03,728.35 ; U1.1@2641.23,733.65 ccw(c2654.03,746.45) 2654.03,728.35 ; U1.1@2641.23,733.65 ccw(c2654.03,746.45) 2654.03,728.35 ; 2690.62,827.05 cw(c2690.62,783.51) R3.1@2721.4,814.3 ; 2690.62,827.05 ccw(c2690.62,870.58) R3.1@2721.4,839.8 ; 2690.62,827.05 cw(c2690.62,783.51) R3.1@2721.4,814.3 ; 2690.62,827.05 ccw(c2690.62,870.58) R3.1@2721.4,839.8 ; 2690.62,827.05 cw(c2690.62,783.51) R3.1@2721.4,814.3 ; 2690.62,827.05 ccw(c2690.62,870.58) R3.1@2721.4,839.8 ; R3.1@2723.37,814.3 cw(c2692.59,783.51) 2736.12,783.51 ; R3.1@2723.37,814.3 cw(c2692.59,783.51) 2736.12,783.51 ; R3.1@2723.37,814.3 cw(c2692.59,783.51) 2736.12,783.51 ; 2736.12,783.51 cw(c2779.65,783.51) R3.1@2748.87,814.3 ; 2736.12,783.51 cw(c2779.65,783.51) R3.1@2748.87,814.3 ; 2736.12,783.51 cw(c2779.65,783.51) R3.1@2748.87,814.3
DBG_RESET: R14.1 U2.6 | length 773.3
  TopLayer w10: U2.6@1669.29,1224.81 1669.29,1297.92 1701.37,1330 1920,1330 2025,1225 R14.1@2105,1225 R14.1@2105,1227.53 ; 2059.5,1225 cw(c2059.5,1181.47) R14.1@2090.28,1212.25 ; 2059.5,1225 ccw(c2059.5,1268.53) R14.1@2090.28,1237.75 ; 2059.5,1225 cw(c2059.5,1181.47) R14.1@2090.28,1212.25 ; 2059.5,1225 ccw(c2059.5,1268.53) R14.1@2090.28,1237.75 ; 2059.5,1225 cw(c2059.5,1181.47) R14.1@2090.28,1212.25 ; 2059.5,1225 ccw(c2059.5,1268.53) R14.1@2090.28,1237.75
DUT_CSN: JP2.5 U3.16 | length 1522.4
  TopLayer w10: 3043.7,1237.01 U3.16@2978.43,1237.01 v1(3140,1237.01) ; U3.16@3021.23,1231.7 cw(c3034.03,1218.9) 3034.03,1237.01 ; U3.16@3021.23,1231.7 cw(c3034.03,1218.9) 3034.03,1237.01 ; U3.16@3021.23,1231.7 cw(c3034.03,1218.9) 3034.03,1237.01 ; U3.16@3021.23,1231.7 cw(c3034.03,1218.9) 3034.03,1237.01 ; U3.16@3021.23,1231.7 cw(c3034.03,1218.9) 3034.03,1237.01 ; U3.16@3021.23,1231.7 cw(c3034.03,1218.9) 3034.03,1237.01 ; U3.16@3021.23,1242.31 ccw(c3034.03,1255.11) 3034.03,1237.01 ; U3.16@3021.23,1242.31 ccw(c3034.03,1255.11) 3034.03,1237.01 ; U3.16@3021.23,1242.31 ccw(c3034.03,1255.11) 3034.03,1237.01 ; U3.16@3021.23,1242.31 ccw(c3034.03,1255.11) 3034.03,1237.01 ; U3.16@3021.23,1242.31 ccw(c3034.03,1255.11) 3034.03,1237.01 ; U3.16@3021.23,1242.31 ccw(c3034.03,1255.11) 3034.03,1237.01 ; 3127.93,1237.01 cw(c3127.93,1224.94) v1@3136.46,1233.47 ; 3127.93,1237.01 ccw(c3127.93,1249.08) v1@3136.46,1240.54 ; 3127.93,1237.01 cw(c3127.93,1224.94) v1@3136.46,1233.47 ; 3127.93,1237.01 ccw(c3127.93,1249.08) v1@3136.46,1240.54 ; 3127.93,1237.01 cw(c3127.93,1224.94) v1@3136.46,1233.47 ; 3127.93,1237.01 ccw(c3127.93,1249.08) v1@3136.46,1240.54
  BottomLayer w10: v1(3140,1237.01) 3140,1010 3264.17,885.83 JP2.5@3394.88,885.83 ; v1@3136.46,1233.47 cw(c3127.93,1224.94) 3140,1224.94 ; v1@3136.46,1233.47 cw(c3127.93,1224.94) 3140,1224.94 ; v1@3136.46,1233.47 cw(c3127.93,1224.94) 3140,1224.94 ; 3140,1224.94 cw(c3152.07,1224.94) v1@3143.54,1233.47 ; 3140,1224.94 cw(c3152.07,1224.94) v1@3143.54,1233.47 ; 3140,1224.94 cw(c3152.07,1224.94) v1@3143.54,1233.47 ; 3332.11,885.83 cw(c3332.11,823.06) JP2.5@3376.5,867.44 ; 3332.11,885.83 ccw(c3332.11,948.6) JP2.5@3376.5,904.21 ; 3332.11,885.83 cw(c3332.11,823.06) JP2.5@3376.5,867.44 ; 3332.11,885.83 ccw(c3332.11,948.6) JP2.5@3376.5,904.21 ; 3332.11,885.83 cw(c3332.11,823.06) JP2.5@3376.5,867.44 ; 3332.11,885.83 ccw(c3332.11,948.6) JP2.5@3376.5,904.21 ; 3356.25,885.83 cw(c3356.25,847.2) JP2.5@3383.57,874.51 ; 3356.25,885.83 ccw(c3356.25,924.45) JP2.5@3383.57,897.14 ; 3356.25,885.83 cw(c3356.25,847.2) JP2.5@3383.57,874.51 ; 3356.25,885.83 ccw(c3356.25,924.45) JP2.5@3383.57,897.14 ; 3356.25,885.83 cw(c3356.25,847.2) JP2.5@3383.57,874.51 ; 3356.25,885.83 ccw(c3356.25,924.45) JP2.5@3383.57,897.14
DUT_DC: JP2.3 U3.15 | length 1062.9
  TopLayer w10: U3.15@2978.43,1187.01 3112.99,1187.01 3314.17,985.83 JP2.3@3394.88,985.83 ; U3.15@3021.23,1181.7 cw(c3034.03,1168.9) 3034.03,1187.01 ; U3.15@3021.23,1181.7 cw(c3034.03,1168.9) 3034.03,1187.01 ; U3.15@3021.23,1181.7 cw(c3034.03,1168.9) 3034.03,1187.01 ; U3.15@3021.23,1192.31 ccw(c3034.03,1205.11) 3034.03,1187.01 ; U3.15@3021.23,1192.31 ccw(c3034.03,1205.11) 3034.03,1187.01 ; U3.15@3021.23,1192.31 ccw(c3034.03,1205.11) 3034.03,1187.01 ; 3332.11,985.83 cw(c3332.11,923.06) JP2.3@3376.5,967.44 ; 3332.11,985.83 ccw(c3332.11,1048.6) JP2.3@3376.5,1004.21 ; 3332.11,985.83 cw(c3332.11,923.06) JP2.3@3376.5,967.44 ; 3332.11,985.83 ccw(c3332.11,1048.6) JP2.3@3376.5,1004.21 ; 3332.11,985.83 cw(c3332.11,923.06) JP2.3@3376.5,967.44 ; 3332.11,985.83 ccw(c3332.11,1048.6) JP2.3@3376.5,1004.21 ; 3356.25,985.83 cw(c3356.25,947.2) JP2.3@3383.57,974.51 ; 3356.25,985.83 ccw(c3356.25,1024.45) JP2.3@3383.57,997.14 ; 3356.25,985.83 cw(c3356.25,947.2) JP2.3@3383.57,974.51 ; 3356.25,985.83 ccw(c3356.25,1024.45) JP2.3@3383.57,997.14 ; 3356.25,985.83 cw(c3356.25,947.2) JP2.3@3383.57,974.51 ; 3356.25,985.83 ccw(c3356.25,1024.45) JP2.3@3383.57,997.14
DUT_DD: JP2.4 U1.18 | length 1227.7
  TopLayer w10: U1.18@2978.43,628.35 3055,628.35 3361.65,935 3444.06,935 JP2.4@3494.88,985.83 ; U1.18@3021.23,623.04 cw(c3034.03,610.24) 3034.03,628.35 ; U1.18@3021.23,623.04 cw(c3034.03,610.24) 3034.03,628.35 ; U1.18@3021.23,623.04 cw(c3034.03,610.24) 3034.03,628.35 ; U1.18@3021.23,633.65 ccw(c3034.03,646.45) 3034.03,628.35 ; U1.18@3021.23,633.65 ccw(c3034.03,646.45) 3034.03,628.35 ; U1.18@3021.23,633.65 ccw(c3034.03,646.45) 3034.03,628.35 ; 3450.5,941.44 cw(c3494.88,897.06) JP2.4@3494.88,959.83 ; 3450.5,941.44 ccw(c3406.11,985.83) JP2.4@3468.88,985.83 ; 3450.5,941.44 cw(c3494.88,897.06) JP2.4@3494.88,959.83 ; 3450.5,941.44 ccw(c3406.11,985.83) JP2.4@3468.88,985.83 ; 3450.5,941.44 cw(c3494.88,897.06) JP2.4@3494.88,959.83 ; 3450.5,941.44 ccw(c3406.11,985.83) JP2.4@3468.88,985.83 ; 3467.57,958.51 cw(c3494.88,931.2) JP2.4@3494.88,969.83 ; 3467.57,958.51 ccw(c3440.25,985.83) JP2.4@3478.88,985.83 ; 3467.57,958.51 cw(c3494.88,931.2) JP2.4@3494.88,969.83 ; 3467.57,958.51 ccw(c3440.25,985.83) JP2.4@3478.88,985.83 ; 3467.57,958.51 cw(c3494.88,931.2) JP2.4@3494.88,969.83 ; 3467.57,958.51 ccw(c3440.25,985.83) JP2.4@3478.88,985.83
DUT_MISO/RX: JP2.10 U3.8 U3.9 | length 2196.2
  TopLayer w10: U3.8@2598.43,1087.01 U3.9@2598.43,1037.01 2672.99,1037.01 v1(2715,995) ; U3.9@2593.12,1042.31 ccw(c2580.32,1055.11) 2598.43,1055.11 ; U3.9@2593.12,1042.31 ccw(c2580.32,1055.11) 2598.43,1055.11 ; U3.9@2593.12,1042.31 ccw(c2580.32,1055.11) 2598.43,1055.11 ; U3.8@2593.12,1081.7 cw(c2580.32,1068.9) 2598.43,1068.9 ; U3.8@2593.12,1081.7 cw(c2580.32,1068.9) 2598.43,1068.9 ; U3.8@2593.12,1081.7 cw(c2580.32,1068.9) 2598.43,1068.9 ; 2598.43,1055.11 ccw(c2616.53,1055.11) U3.9@2603.73,1042.31 ; 2598.43,1055.11 ccw(c2616.53,1055.11) U3.9@2603.73,1042.31 ; 2598.43,1055.11 ccw(c2616.53,1055.11) U3.9@2603.73,1042.31 ; 2598.43,1068.9 cw(c2616.53,1068.9) U3.8@2603.73,1081.7 ; 2598.43,1068.9 cw(c2616.53,1068.9) U3.8@2603.73,1081.7 ; 2598.43,1068.9 cw(c2616.53,1068.9) U3.8@2603.73,1081.7 ; U3.9@2641.23,1031.7 cw(c2654.03,1018.9) 2654.03,1037.01 ; U3.9@2641.23,1031.7 cw(c2654.03,1018.9) 2654.03,1037.01 ; U3.9@2641.23,1031.7 cw(c2654.03,1018.9) 2654.03,1037.01 ; U3.9@2641.23,1042.31 ccw(c2654.03,1055.11) 2654.03,1037.01 ; U3.9@2641.23,1042.31 ccw(c2654.03,1055.11) 2654.03,1037.01 ; U3.9@2641.23,1042.31 ccw(c2654.03,1055.11) 2654.03,1037.01 ; 2706.46,1003.54 cw(c2697.93,995) v1@2710,995 ; 2706.46,1003.54 ccw(c2715,1012.07) v1@2715,1000 ; 2706.46,1003.54 cw(c2697.93,995) v1@2710,995 ; 2706.46,1003.54 ccw(c2715,1012.07) v1@2715,1000 ; 2706.46,1003.54 cw(c2697.93,995) v1@2710,995 ; 2706.46,1003.54 ccw(c2715,1012.07) v1@2715,1000
  BottomLayer w10: v1(2715,995) 2715,770 2950,535 3344.06,535 JP2.10@3494.88,685.83 ; v1@2711.46,991.46 cw(c2702.93,982.93) 2715,982.93 ; v1@2711.46,991.46 cw(c2702.93,982.93) 2715,982.93 ; v1@2711.46,991.46 cw(c2702.93,982.93) 2715,982.93 ; 2715,982.93 cw(c2727.07,982.93) v1@2718.54,991.46 ; 2715,982.93 cw(c2727.07,982.93) v1@2718.54,991.46 ; 2715,982.93 cw(c2727.07,982.93) v1@2718.54,991.46 ; 3450.5,641.44 cw(c3494.88,597.06) JP2.10@3494.88,659.83 ; 3450.5,641.44 ccw(c3406.11,685.83) JP2.10@3468.88,685.83 ; 3450.5,641.44 cw(c3494.88,597.06) JP2.10@3494.88,659.83 ; 3450.5,641.44 ccw(c3406.11,685.83) JP2.10@3468.88,685.83 ; 3450.5,641.44 cw(c3494.88,597.06) JP2.10@3494.88,659.83 ; 3450.5,641.44 ccw(c3406.11,685.83) JP2.10@3468.88,685.83 ; 3467.57,658.51 cw(c3494.88,631.2) JP2.10@3494.88,669.83 ; 3467.57,658.51 ccw(c3440.25,685.83) JP2.10@3478.88,685.83 ; 3467.57,658.51 cw(c3494.88,631.2) JP2.10@3494.88,669.83 ; 3467.57,658.51 ccw(c3440.25,685.83) JP2.10@3478.88,685.83 ; 3467.57,658.51 cw(c3494.88,631.2) JP2.10@3494.88,669.83 ; 3467.57,658.51 ccw(c3440.25,685.83) JP2.10@3478.88,685.83
DUT_MOSI/TX: JP2.8 U3.13 U3.18 | length 2033.3
  TopLayer w10: U3.18@2978.43,1337.01 2910,1337.01 2885,1312.01 2885,1115 2912.99,1087.01 U3.13@2978.43,1087.01 v1(3057.99,1087.01) ; 2922.82,1087.01 cw(c2922.82,1068.9) U3.13@2935.62,1081.7 ; 2922.82,1087.01 ccw(c2922.82,1105.11) U3.13@2935.62,1092.31 ; 2922.82,1087.01 cw(c2922.82,1068.9) U3.13@2935.62,1081.7 ; 2922.82,1087.01 ccw(c2922.82,1105.11) U3.13@2935.62,1092.31 ; 2922.82,1087.01 cw(c2922.82,1068.9) U3.13@2935.62,1081.7 ; 2922.82,1087.01 ccw(c2922.82,1105.11) U3.13@2935.62,1092.31 ; 2922.82,1337.01 cw(c2922.82,1318.9) U3.18@2935.62,1331.7 ; 2922.82,1337.01 ccw(c2922.82,1355.11) U3.18@2935.62,1342.31 ; 2922.82,1337.01 cw(c2922.82,1318.9) U3.18@2935.62,1331.7 ; 2922.82,1337.01 ccw(c2922.82,1355.11) U3.18@2935.62,1342.31 ; 2922.82,1337.01 cw(c2922.82,1318.9) U3.18@2935.62,1331.7 ; 2922.82,1337.01 ccw(c2922.82,1355.11) U3.18@2935.62,1342.31 ; U3.13@3021.23,1081.7 cw(c3034.03,1068.9) 3034.03,1087.01 ; U3.13@3021.23,1081.7 cw(c3034.03,1068.9) 3034.03,1087.01 ; U3.13@3021.23,1081.7 cw(c3034.03,1068.9) 3034.03,1087.01 ; U3.13@3021.23,1092.31 ccw(c3034.03,1105.11) 3034.03,1087.01 ; U3.13@3021.23,1092.31 ccw(c3034.03,1105.11) 3034.03,1087.01 ; U3.13@3021.23,1092.31 ccw(c3034.03,1105.11) 3034.03,1087.01 ; 3045.92,1087.01 cw(c3045.92,1074.94) v1@3054.46,1083.47 ; 3045.92,1087.01 ccw(c3045.92,1099.08) v1@3054.46,1090.54 ; 3045.92,1087.01 cw(c3045.92,1074.94) v1@3054.46,1083.47 ; 3045.92,1087.01 ccw(c3045.92,1099.08) v1@3054.46,1090.54 ; 3045.92,1087.01 cw(c3045.92,1074.94) v1@3054.46,1083.47 ; 3045.92,1087.01 ccw(c3045.92,1099.08) v1@3054.46,1090.54
  BottomLayer w10: v1(3057.99,1087.01) 3057.99,922.01 3245,735 3444.06,735 JP2.8@3494.88,785.83 ; v1@3054.46,1083.47 cw(c3045.92,1074.94) 3057.99,1074.94 ; v1@3054.46,1083.47 cw(c3045.92,1074.94) 3057.99,1074.94 ; v1@3054.46,1083.47 cw(c3045.92,1074.94) 3057.99,1074.94 ; 3057.99,1074.94 cw(c3070.06,1074.94) v1@3061.53,1083.47 ; 3057.99,1074.94 cw(c3070.06,1074.94) v1@3061.53,1083.47 ; 3057.99,1074.94 cw(c3070.06,1074.94) v1@3061.53,1083.47 ; 3450.5,741.44 cw(c3494.88,697.06) JP2.8@3494.88,759.83 ; 3450.5,741.44 ccw(c3406.11,785.83) JP2.8@3468.88,785.83 ; 3450.5,741.44 cw(c3494.88,697.06) JP2.8@3494.88,759.83 ; 3450.5,741.44 ccw(c3406.11,785.83) JP2.8@3468.88,785.83 ; 3450.5,741.44 cw(c3494.88,697.06) JP2.8@3494.88,759.83 ; 3450.5,741.44 ccw(c3406.11,785.83) JP2.8@3468.88,785.83 ; 3467.57,758.51 cw(c3494.88,731.2) JP2.8@3494.88,769.83 ; 3467.57,758.51 ccw(c3440.25,785.83) JP2.8@3478.88,785.83 ; 3467.57,758.51 cw(c3494.88,731.2) JP2.8@3494.88,769.83 ; 3467.57,758.51 ccw(c3440.25,785.83) JP2.8@3478.88,785.83 ; 3467.57,758.51 cw(c3494.88,731.2) JP2.8@3494.88,769.83 ; 3467.57,758.51 ccw(c3440.25,785.83) JP2.8@3478.88,785.83
DUT_RESET: JP2.7 U3.14 | length 1348.4
  TopLayer w10: U3.14@2978.43,1137.01 v1(3095,1137.01) ; U3.14@3021.23,1131.7 cw(c3034.03,1118.9) 3034.03,1137.01 ; U3.14@3021.23,1131.7 cw(c3034.03,1118.9) 3034.03,1137.01 ; U3.14@3021.23,1131.7 cw(c3034.03,1118.9) 3034.03,1137.01 ; U3.14@3021.23,1142.31 ccw(c3034.03,1155.11) 3034.03,1137.01 ; U3.14@3021.23,1142.31 ccw(c3034.03,1155.11) 3034.03,1137.01 ; U3.14@3021.23,1142.31 ccw(c3034.03,1155.11) 3034.03,1137.01 ; 3082.93,1137.01 cw(c3082.93,1124.94) v1@3091.46,1133.47 ; 3082.93,1137.01 ccw(c3082.93,1149.08) v1@3091.46,1140.54 ; 3082.93,1137.01 cw(c3082.93,1124.94) v1@3091.46,1133.47 ; 3082.93,1137.01 ccw(c3082.93,1149.08) v1@3091.46,1140.54 ; 3082.93,1137.01 cw(c3082.93,1124.94) v1@3091.46,1133.47 ; 3082.93,1137.01 ccw(c3082.93,1149.08) v1@3091.46,1140.54
  BottomLayer w10: v1(3095,1137.01) 3095,950 3259.17,785.83 JP2.7@3394.88,785.83 ; v1@3091.46,1133.47 cw(c3082.93,1124.94) 3095,1124.94 ; v1@3091.46,1133.47 cw(c3082.93,1124.94) 3095,1124.94 ; v1@3091.46,1133.47 cw(c3082.93,1124.94) 3095,1124.94 ; 3095,1124.94 cw(c3107.07,1124.94) v1@3098.54,1133.47 ; 3095,1124.94 cw(c3107.07,1124.94) v1@3098.54,1133.47 ; 3095,1124.94 cw(c3107.07,1124.94) v1@3098.54,1133.47 ; 3332.11,785.83 cw(c3332.11,723.06) JP2.7@3376.5,767.44 ; 3332.11,785.83 ccw(c3332.11,848.6) JP2.7@3376.5,804.21 ; 3332.11,785.83 cw(c3332.11,723.06) JP2.7@3376.5,767.44 ; 3332.11,785.83 ccw(c3332.11,848.6) JP2.7@3376.5,804.21 ; 3332.11,785.83 cw(c3332.11,723.06) JP2.7@3376.5,767.44 ; 3332.11,785.83 ccw(c3332.11,848.6) JP2.7@3376.5,804.21 ; 3356.25,785.83 cw(c3356.25,747.2) JP2.7@3383.57,774.51 ; 3356.25,785.83 ccw(c3356.25,824.45) JP2.7@3383.57,797.14 ; 3356.25,785.83 cw(c3356.25,747.2) JP2.7@3383.57,774.51 ; 3356.25,785.83 ccw(c3356.25,824.45) JP2.7@3383.57,797.14 ; 3356.25,785.83 cw(c3356.25,747.2) JP2.7@3383.57,774.51 ; 3356.25,785.83 ccw(c3356.25,824.45) JP2.7@3383.57,797.14
DUT_SCLK: JP2.6 U3.17 | length 1504.2
  TopLayer w10: U3.17@2978.43,1287.01 v1(3190,1287.01) ; U3.17@3021.23,1281.7 cw(c3034.03,1268.9) 3034.03,1287.01 ; U3.17@3021.23,1281.7 cw(c3034.03,1268.9) 3034.03,1287.01 ; U3.17@3021.23,1281.7 cw(c3034.03,1268.9) 3034.03,1287.01 ; U3.17@3021.23,1292.31 ccw(c3034.03,1305.11) 3034.03,1287.01 ; U3.17@3021.23,1292.31 ccw(c3034.03,1305.11) 3034.03,1287.01 ; U3.17@3021.23,1292.31 ccw(c3034.03,1305.11) 3034.03,1287.01 ; 3177.93,1287.01 cw(c3177.93,1274.94) v1@3186.46,1283.47 ; 3177.93,1287.01 ccw(c3177.93,1299.08) v1@3186.46,1290.54 ; 3177.93,1287.01 cw(c3177.93,1274.94) v1@3186.46,1283.47 ; 3177.93,1287.01 ccw(c3177.93,1299.08) v1@3186.46,1290.54 ; 3177.93,1287.01 cw(c3177.93,1274.94) v1@3186.46,1283.47 ; 3177.93,1287.01 ccw(c3177.93,1299.08) v1@3186.46,1290.54
  BottomLayer w10: v1(3190,1287.01) 3190,1040 3295,935 3445.71,935 JP2.6@3494.88,885.83 ; v1@3186.46,1283.47 cw(c3177.93,1274.94) 3190,1274.94 ; v1@3186.46,1283.47 cw(c3177.93,1274.94) 3190,1274.94 ; v1@3186.46,1283.47 cw(c3177.93,1274.94) 3190,1274.94 ; 3190,1274.94 cw(c3202.07,1274.94) v1@3193.54,1283.47 ; 3190,1274.94 cw(c3202.07,1274.94) v1@3193.54,1283.47 ; 3190,1274.94 cw(c3202.07,1274.94) v1@3193.54,1283.47 ; 3450.5,930.21 cw(c3406.11,885.83) JP2.6@3468.88,885.83 ; 3450.5,930.21 ccw(c3494.88,974.6) JP2.6@3494.88,911.83 ; 3450.5,930.21 cw(c3406.11,885.83) JP2.6@3468.88,885.83 ; 3450.5,930.21 ccw(c3494.88,974.6) JP2.6@3494.88,911.83 ; 3450.5,930.21 cw(c3406.11,885.83) JP2.6@3468.88,885.83 ; 3450.5,930.21 ccw(c3494.88,974.6) JP2.6@3494.88,911.83 ; 3467.57,913.14 cw(c3440.25,885.83) JP2.6@3478.88,885.83 ; 3467.57,913.14 ccw(c3494.88,940.45) JP2.6@3494.88,901.83 ; 3467.57,913.14 cw(c3440.25,885.83) JP2.6@3478.88,885.83 ; 3467.57,913.14 ccw(c3494.88,940.45) JP2.6@3494.88,901.83 ; 3467.57,913.14 cw(c3440.25,885.83) JP2.6@3478.88,885.83 ; 3467.57,913.14 ccw(c3494.88,940.45) JP2.6@3494.88,901.83
DUT_VCC: JP2.2 R11.1 | length 716.5
  TopLayer w15: JP2.2@3494.88,1085.83 R11.1@3494.88,1358.27 ; JP2.2@3478.26,1102.44 ccw(c3438.15,1142.56) 3494.88,1142.56 ; JP2.2@3478.26,1102.44 ccw(c3438.15,1142.56) 3494.88,1142.56 ; JP2.2@3478.26,1102.44 ccw(c3438.15,1142.56) 3494.88,1142.56 ; R11.1@3483.58,1345.4 cw(c3456.31,1318.13) 3494.88,1318.13 ; R11.1@3483.58,1345.4 cw(c3456.31,1318.13) 3494.88,1318.13 ; R11.1@3483.58,1345.4 cw(c3456.31,1318.13) 3494.88,1318.13 ; 3494.88,1142.56 ccw(c3551.62,1142.56) JP2.2@3511.5,1102.44 ; 3494.88,1142.56 ccw(c3551.62,1142.56) JP2.2@3511.5,1102.44 ; 3494.88,1142.56 ccw(c3551.62,1142.56) JP2.2@3511.5,1102.44 ; 3494.88,1319.65 cw(c3531.3,1319.65) R11.1@3505.55,1345.4 ; 3494.88,1319.65 cw(c3531.3,1319.65) R11.1@3505.55,1345.4 ; 3494.88,1319.65 cw(c3531.3,1319.65) R11.1@3505.55,1345.4